# Altium PCB PCB1.PcbDoc
Units mm, origin at the board's own origin, x right, y up, seen from the top; angles counter-clockwise.
Board outline 114.75 x 69.75 mm, 2 copper layers (Top Layer, Bottom Layer), stack 2.08 mm thick; 29 components, 32 nets, 83 pads, 6 vias.
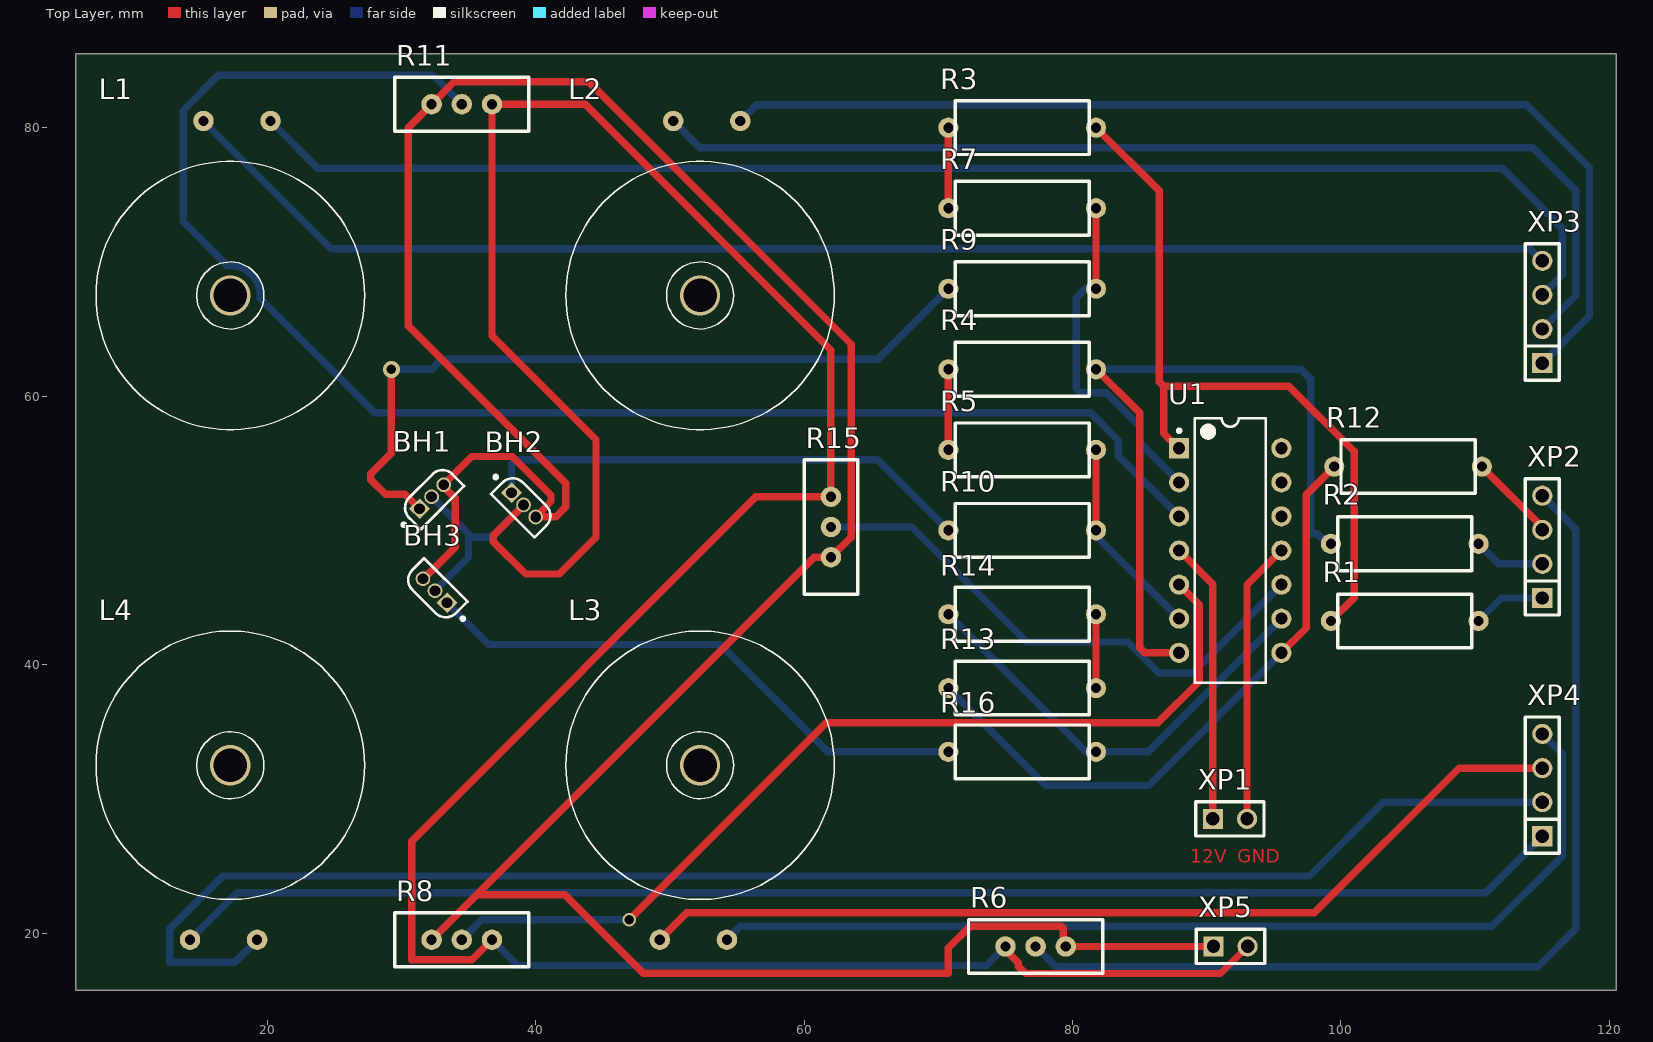
[diagram p0: Top Layer view]
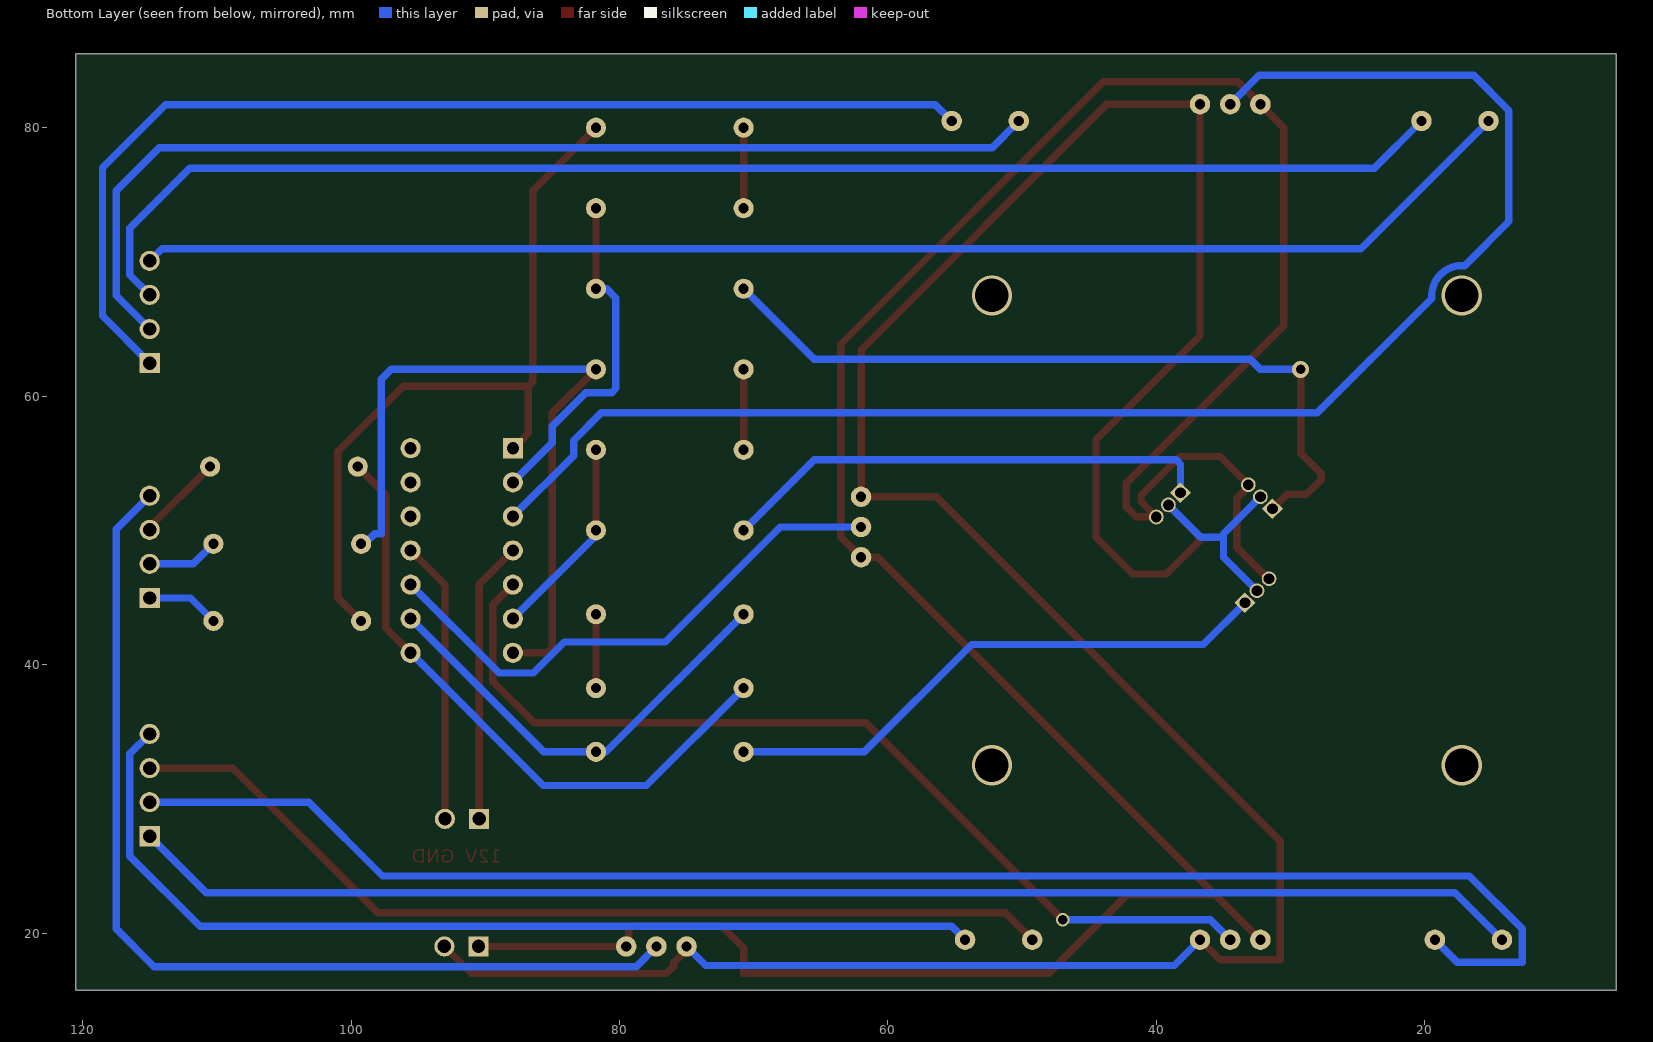
[diagram p1: Bottom Layer view, seen from below]

## Layer stack, top to bottom
Top Solder: solder mask 0.0254, SM-001, Dk 4
Top Layer: signal copper 0.04
Dielectric 2: core 2, GF-1-50G-2.0 GOST 10316-78, Dk 4.3
Bottom Layer: signal copper 0.04
Bottom Solder: solder mask 0.0254, SM-001, Dk 4

## Board outline
5.75,15.75 5.75,85.496 120.496,85.496 120.496,15.75

## Design rules (kind name [scope] priority, off if disabled: settings)
Clearance [All] p1: gap=0.45 ignorepadtopadclearanceinfootprint=FALSE
PolygonConnect [All] p1: connectstyle=Relief reliefconductorwidth=0.254 reliefentries=4 polygonreliefangle="90 Angle" airgapwidth=0.254
RoutingVias [All] p1: holewidth=0.7 width=1 viastyle="Through Hole" minholewidth=0.6 minwidth=0.85 maxholewidth=0.8 maxwidth=1.25
SolderMaskExpansion [All] p1: expansion=0.102 istentingtop=FALSE
Width [All] p1: maxlimit=0.75 minlimit=0.35 preferedwidth=0.55 minimp=50.000000 maximp=50.000000 favimp=50.000000
30 further rules are at their usual default settings.

## Components (designator, comment, footprint, x,y, rotation, side; value= is the part's Value field where it differs from the comment)
BH1 "ss495AN" DIOD-TO92-3 32.25,52.5 r45 top
BH2 "ss495AN" DIOD-TO92-3 39.102,51.898 r315 top
BH3 "ss495AN" DIOD-TO92-3 32.5,45.5 r135 top
L1 "Coil" INDUCTOR 17.25,67.5 r0 top
L2 "Coil" INDUCTOR 52.25,67.5 r0 top
L3 "Coil" INDUCTOR 52.25,32.5 r180 top
L4 "Coil" INDUCTOR 17.25,32.5 r180 top
R1 "5.6kOhm" RESISTOR2 104.75,43.25 r180 top
R2 "5.6kOhm" RESISTOR2 104.75,49 r180 top
R3 "91kOhm" RESISTOR2 76.25,80 r180 top
R4 "91kOhm" RESISTOR2 76.25,62 r180 top
R5 "91kOhm" RESISTOR2 76.25,56 r0 top
R6 "10kOhm" R 77.25,19 r0 top
R7 "91kOhm" RESISTOR2 76.25,74 r0 top
R8 "10kOhm" R 34.5,19.5 r180 top
R9 "47kOhm" RESISTOR2 76.25,68 r180 top
R10 "47kOhm" RESISTOR2 76.25,50 r180 top
R11 "10kOhm" R 34.5,81.75 r180 top
R12 "5.6kOhm" RESISTOR2 105,54.75 r180 top
R13 "91kOhm" RESISTOR2 76.25,38.25 r0 top
R14 "91kOhm" RESISTOR2 76.25,43.75 r180 top
R15 "10kOhm" R 62,50.25 r270 top
R16 "47kOhm" RESISTOR2 76.25,33.5 r180 top
U1 "LM324AN" TI-N0014A 91.75,48.5 r0 top
XP1 "СНП346-2ВП22-1-В" PLS-2 91.73,28.5 r0 top
XP2 "СНП346-4ВП22-1-В" PLS-4 115,48.77 r90 top
XP3 "СНП346-4ВП22-1-В" PLS-4 115,66.27 r90 top
XP4 "СНП346-4ВП22-1-В" PLS-4 115,31.02 r90 top
XP5 "СНП346-2ВП22-1-В" PLS-2 91.77,19 r0 top (schematic designator XP1)

## Footprints (in the part's own frame and the unit in brackets; to place one, negate y for a bottom-side part, rotate by r counter-clockwise, add the part's x,y. Pads: shape width x height; smd on the part's side, far side on the other; paste and mask are expansions set on the pad)
DIOD-TO92-3 [mm] "TO, 3-Leads, Body Dia 4.57mm, Pitch 1.27mm"
  rect 1.1x1.1 hole 0.8 mask+0.05: 1(-1.27,0)
  round 1.1 hole 0.8 mask+0.05: 2(0,0) 3(1.27,0)
  silkscreen extent -3.06,-1.14 2.29,1.14, body extent -2.28,-1.14 2.28,1.14, height 4.01
INDUCTOR [mil]
  round 60 hole 30: 1(-78.74,511.81) 2(118.11,511.81)
  silkscreen extent -394,-394 394,394
PLS-2 [mm]
  rect 1.5x1.5 hole 1: 1(-1.27,0)
  round 1.5 hole 1: 2(1.27,0)
  silkscreen extent -2.54,-1.27 2.54,1.27, body extent -2.54,-1.27 2.54,1.27, height 8.9
PLS-4 [mm]
  rect 1.5x1.5 hole 1: 1(-3.81,0)
  round 1.5 hole 1: 2(-1.27,0) 3(1.27,0) 4(3.81,0)
  silkscreen extent -5.08,-1.27 5.08,1.27, body extent -5.08,-1.27 5.08,1.27, height 8.9
R [mil]
  round 60 hole 30: 1(-88.58,0) 2(88.58,0) 3(0,0)
  silkscreen extent -197,-79 197,79
RESISTOR2 [mm]
  round 1.5 hole 0.762: 1(-5.5,0) 2(5.5,0)
  silkscreen extent -5,-2 5,2
TI-N0014A [mm] "DIP, 14-Leads, Body 19.7x6.6mm, Pitch 2.54mm"
  rect 1.5x1.5 hole 0.9: 1(-3.81,7.62)
  round 1.5 hole 0.9: 2(-3.81,5.08) 3(-3.81,2.54) 4(-3.81,0) 5(-3.81,-2.54) 6(-3.81,-5.08) 7(-3.81,-7.62) 8(3.81,-7.62) 9(3.81,-5.08) 10(3.81,-2.54) 11(3.81,0) 12(3.81,2.54) 13(3.81,5.08) 14(3.81,7.62)
  silkscreen extent -3.93,-9.85 2.65,9.85, body extent -3.95,-9.85 3.95,9.85, height 5.08

## Part data
BH1 BH2 BH3: library part CMP-013-00025-3, "P-Channel Enhancement Mode Vertical DMOS FET, 60 VDS, 3-Pin TO92, RoHS, Bulk", Case/Package=TO-226-3, Input Capacitance=50pF, Manufacturer="Diodes Inc", Max Operating Temperature=150°C, Min Operating Temperature=-55°C, Nominal Dual Supply Voltage=-60V, Package Description="3-Pin Transistor Outline Package, Body Dia 4.57 mm, Pitch 1.27 mm", Package Quantity=4000, Package Reference=TO92-3, Power=625mW, Datasheet URL=http://www.diodes.com/_files/datasheets/ZVP3306A.pdf, Datasheet Version="Rev. 2, 03/1994", Elements=1, Mounting Technology=TH, Nominal Vgs=-3.5V, Packaging=Bulk, Pins=3, Rds On Max=14Ohm, RoHS Compliant=True, Typical Rise Time=8ns
L1 L2 L3 L4: library part Inductor
R1 R2 R3 R4 R5 R7 R9 R10 R12 R13 R14 R16: library part Resistor
R6 R8 R11 R15: library part Res3
U1: library part CMP-014-00016-1, "Quadruple Operational Amplifier, 1.2 MHz, 0 to 70 degC, 14-Pin PDIP (N), Pb-Free (RoHS), Tube", Case/Package=DIP, Manufacturer="Texas Instruments (TI)", Max Dual Supply Voltage=16V, Max Operating Temperature=70°C, Min Dual Supply Voltage=1.5V, Min Operating Temperature=0°C, Nominal Dual Supply Voltage=12V, Nominal Supply Current=3mA, Nominal Voltage Gain=100dB, Output Current=30mA, Package Description="14-Pin Double In-line Package, Body 19.305 x 6.35 mm, Pitch 2.54 mm", Package Quantity=25, Package Reference=N-14, Datasheet URL=http://www.ti.com/lit/ds/symlink/lm324a.pdf, Datasheet Version="SLOS066W, 03/2015", Manufacturer URL=http://www.ti.com/, Max Supply Voltage=16V, Min Supply Voltage=1.5V, Mounting Technology=TH, Nominal Supply Voltage=12V, Package URL=http://www.ti.com/lit/ml/mpdi002c/mpdi002c.pdf, Pins=14, RoHS Compliant=True, Unity Gain Bandwidth Product=1.2MHz
XP1 XP5: library part CMP-022-000001-1, Limit Current=1A, Limit Voltage=250V, Manufacturer="ОАО \"Карачевский Завод \"Электродеталь\"", Resistance=15mohm, Working Temperature Max=+85°С, Working Temperature Min=-60°С, Application Category=5, Connector Type=Male, Functional Analog=PLS-2, Part Number=СНП346-2ВП22-1-В, Pins=2, Pitch=2.54mm, Specification="РЮМК.430420.011 ТУ", Surface Finish=Silver
XP2 XP3 XP4: library part CMP-022-000003-1, Limit Current=1A, Limit Voltage=250V, Manufacturer="ОАО \"Карачевский Завод \"Электродеталь\"", Resistance=15mohm, Working Temperature Max=+85°С, Working Temperature Min=-60°С, Application Category=5, Connector Type=Male, Functional Analog=PLS-4, Part Number=СНП346-4ВП22-1-В, Pins=4, Pitch=2.54mm, Specification="РЮМК.430420.011 ТУ", Surface Finish=Silver

## Via types
v1: diameter 3, hole 2.5, Top Layer to Bottom Layer, 4 vias
v2: diameter 1.27, hole 0.711, Top Layer to Bottom Layer, 1 vias
v3: diameter 1, hole 0.7, Top Layer to Bottom Layer, 1 vias

## Nets (pads, with @x,y where several pads share a name; then routed paths per layer and width w, separated by ;. In a path a pad name is that pad's centre, name@x,y a point inside that pad or via, vN(x,y) a via of type N, cw(c..) or ccw(c..) an arc to the next point about the centre after c; other vN are vias at no path point)
+12: 
GND: BH1.2 BH2.2 BH3.2 R6.1 R8.1 R11.1 R15.1 XP5.2 | length 223.3
  Top Layer w0.55: R8.1 35.259,18.009 30.759,18.009 30.759,26.848 56.412,52.5 R15.1 62,63.438 43.688,81.75 R11.1 36.75,64.5 44.5,56.75 44.5,49.5 41.75,46.75 39.25,46.75 36.853,49.147 36.853,49.603 BH2.2@38.75,51.5 ; R6.1@74.75,19 74.75,18.986 75.964,17.772 75.964,17.536 76.515,16.985 91.025,16.985 XP5.2
  Bottom Layer w0.55: BH1.2@32.379,52.379 32.434,52.324 32.75,52.007 32.75,52 35,49.75 35,49.5 ; BH3.2 32.5,45.507 35,48.007 35,49.5 ; R8.1 38.673,17.577 73.577,17.577 R6.1 ; BH2.2 36.704,49.5 35,49.5
NetBH1_1: BH1.1 R9.2 | length 57.4
  Top Layer w0.55: v2(29.25,62) 29.25,55.75 27.728,54.228 27.728,53.772 28.813,52.687 30.267,52.687 31.25,51.704 BH1.1@31.25,51.5
  Bottom Layer w0.55: v2(29.25,62) 32.25,62 33,62.75 65.5,62.75 R9.2
NetBH2_1: BH2.1 R10.2 | length 37
  Bottom Layer w0.55: BH2.1 38.204,54.928 38.527,55.25 65.5,55.25 R10.2
NetBH3_1: BH3.1 R16.2 | length 41.8
  Bottom Layer w0.55: BH3.1@33.5,44.5 36.5,41.5 53.75,41.5 61.75,33.5 R16.2
NetL1_1: L1.1 XP3.4 | length 104.1
  Bottom Layer w0.55: L1.1 24.757,70.993 114.087,70.993 XP3.4
NetL1_2: L1.2 XP3.3 | length 105.1
  Bottom Layer w0.55: L1.2 23.763,76.987 112.014,76.987 116.484,72.517 116.484,69.024 XP3.3
NetL2_1: L2.1 XP3.2 | length 80.7
  Bottom Layer w0.55: L2.1 52.239,78.511 114.3,78.511 117.5,75.311 117.5,67.5 XP3.2
NetL2_2: L2.2 XP3.1 | length 81.7
  Bottom Layer w0.55: L2.2 56.462,81.712 113.817,81.712 118.516,77.013 118.516,65.976 XP3.1
NetL3_1: L3.1 XP4.4 | length 74.5
  Bottom Layer w0.55: L3.1 55.248,20.498 111.252,20.498 116.484,25.73 116.484,33.346 XP4.4
NetL3_2: L3.2 XP4.3 | length 71
  Top Layer w0.55: L3.2 51.25,21.5 98,21.5 108.79,32.29 XP4.3
NetL4_1: L4.1 XP4.2 | length 115.8
  Bottom Layer w0.55: L4.1 17.581,17.831 12.751,17.831 12.751,20.32 16.681,24.25 97.656,24.25 103.156,29.75 XP4.2
NetL4_2: L4.2 XP4.1 | length 103.9
  Bottom Layer w0.55: L4.2 17.75,23 110.79,23 XP4.1
NetR1_1: R1.1 XP2.1 | length 5.5
  Bottom Layer w0.55: R1.1 111.96,44.96 XP2.1
NetR1_2: R1.2 R3.1 U1.1 | length 55.1
  Top Layer w0.55: R3.1 86.462,75.288 86.462,61.072 86.784,60.75 ; U1.1@87.25,56.75 86.784,57.216 86.784,60.75 ; R1.2 100.99,44.99 100.99,55.88 96.12,60.75 86.784,60.75
NetR2_1: R2.1 XP2.2 | length 5.4
  Bottom Layer w0.55: R2.1 111.75,47.5 XP2.2
NetR2_2: R2.2 R4.1 U1.7 | length 54.9
  Top Layer w0.55: R4.1 85,58.75 85,41.25 85.37,40.88 87.87,40.88 U1.7@88,40.75
  Bottom Layer w0.55: R4.1 97,62 97.75,61.25 97.75,49.75 98.243,49.75 98.993,49 R2.2
NetR3_2: R3.2 R7.1 | length 6
  Top Layer w0.55: R7.1 70.75,76.987 R3.2
NetR4_2: R4.2 R5.1 | length 6
  Top Layer w0.55: R5.1 70.75,58.979 R4.2
NetR5_2: R5.2 R10.1 U1.6 | length 15.1
  Top Layer w0.55: R10.1 R5.2
  Bottom Layer w0.55: R10.1 81.75,49.61 U1.6
NetR6_3: R6.3 XP2.4 | length 75.3
  Bottom Layer w0.55: R6.3 78.749,17.501 114.681,17.501 117.5,20.32 117.5,50.08 XP2.4
NetR7_2: R7.2 R9.1 U1.2 | length 25.8
  Top Layer w0.55: R9.1 R7.2
  Bottom Layer w0.55: R9.1 80.954,68 80.264,67.31 80.264,60.572 80.586,60.25 82.5,60.25 85,57.75 85,56.52 U1.2
NetR8_3: R8.3 U1.5 | length 70.7
  Top Layer w0.55: v3(46.971,20.987) 61.646,35.662 86.36,35.662 89.433,38.735 89.433,44.467 U1.5
  Bottom Layer w0.55: R8.3 35.987,20.987 v3(46.971,20.987)
NetR11_3: R11.3 U1.3 | length 115.4
  Bottom Layer w0.55: R11.3 32.354,83.896 16.358,83.896 13.741,81.28 13.741,73.009 17.025,69.725 17.247,69.725 cw(c17.25,67.5) 19.475,67.497 19.475,67.275 28,58.75 81.356,58.75 83.414,56.693 83.414,55.567 U1.3
NetR12_1: R12.1 XP2.3 | length 6.6
  Top Layer w0.55: R12.1 115,50.25 XP2.3
NetR12_2: R12.2 R13.1 U1.8 | length 47.4
  Top Layer w0.55: U1.8 97.409,42.729 97.409,52.659 R12.2
  Bottom Layer w0.55: R13.1 78.012,30.988 85.668,30.988 U1.8
NetR13_2: R13.2 R14.1 | length 5.5
  Top Layer w0.55: R13.2 R14.1
NetR14_2: R14.2 R16.1 U1.9 | length 33.2
  Bottom Layer w0.55: R14.2 81,33.5 R16.1 85.64,33.5 U1.9
NetR15_3: R15.3 U1.10 | length 40.8
  Bottom Layer w0.55: R15.3 68.012,50.25 76.581,41.681 84.119,41.681 86.43,39.37 88.97,39.37 U1.10
NetU1_4: U1.4 XP1.1 | length 21
  Top Layer w0.55: U1.4 90.46,45.98 XP1.1
NetU1_11: U1.11 XP1.2 | length 21.1
  Top Layer w0.55: XP1.2 93,45.94 U1.11
VCC: BH1.3 BH2.3 BH3.3 R6.2 R8.2 R11.2 R15.2 XP5.1 | length 217.4
  Top Layer w0.55: BH3.3@31.697,46.5 31.972,46.775 32.025,46.775 34,48.75 34,52.398 33.148,53.249 BH1.3 ; R8.2 35.61,22.86 ; BH1.3@33.25,53.5 35.25,55.5 38.25,55.5 41.147,52.603 41.147,52.147 BH2.3 ; BH2.3@40.25,51 41.5,51 42.25,51.75 42.25,53.5 30.5,65.25 30.5,80 R11.2 33.914,83.414 43.967,83.414 63.5,63.881 63.5,49.5 R15.2 60.75,48 35.61,22.86 ; XP5.1 R6.2 79.314,19.186 79.314,20.364 79.178,20.5 72.367,20.5 70.75,18.883 70.75,17 48.023,17 42.163,22.86 35.61,22.86
pads on no net: U1.12 U1.13 U1.14
copper on no net:
  other v1: 17.25,32.5 52.25,32.5 17.25,67.5 52.25,67.5

## Other copper
Top Layer:
  text "12V" at 88.754,25.254 h1
  text "GND" at 92.254,25.254 h1

## Silkscreen, mask and mechanical layers (free items; w line width, h text height)
Mechanical 1:
  the board outline again, w0.254